# EAGLE board Project_2 (EAGLE 9.5.1)
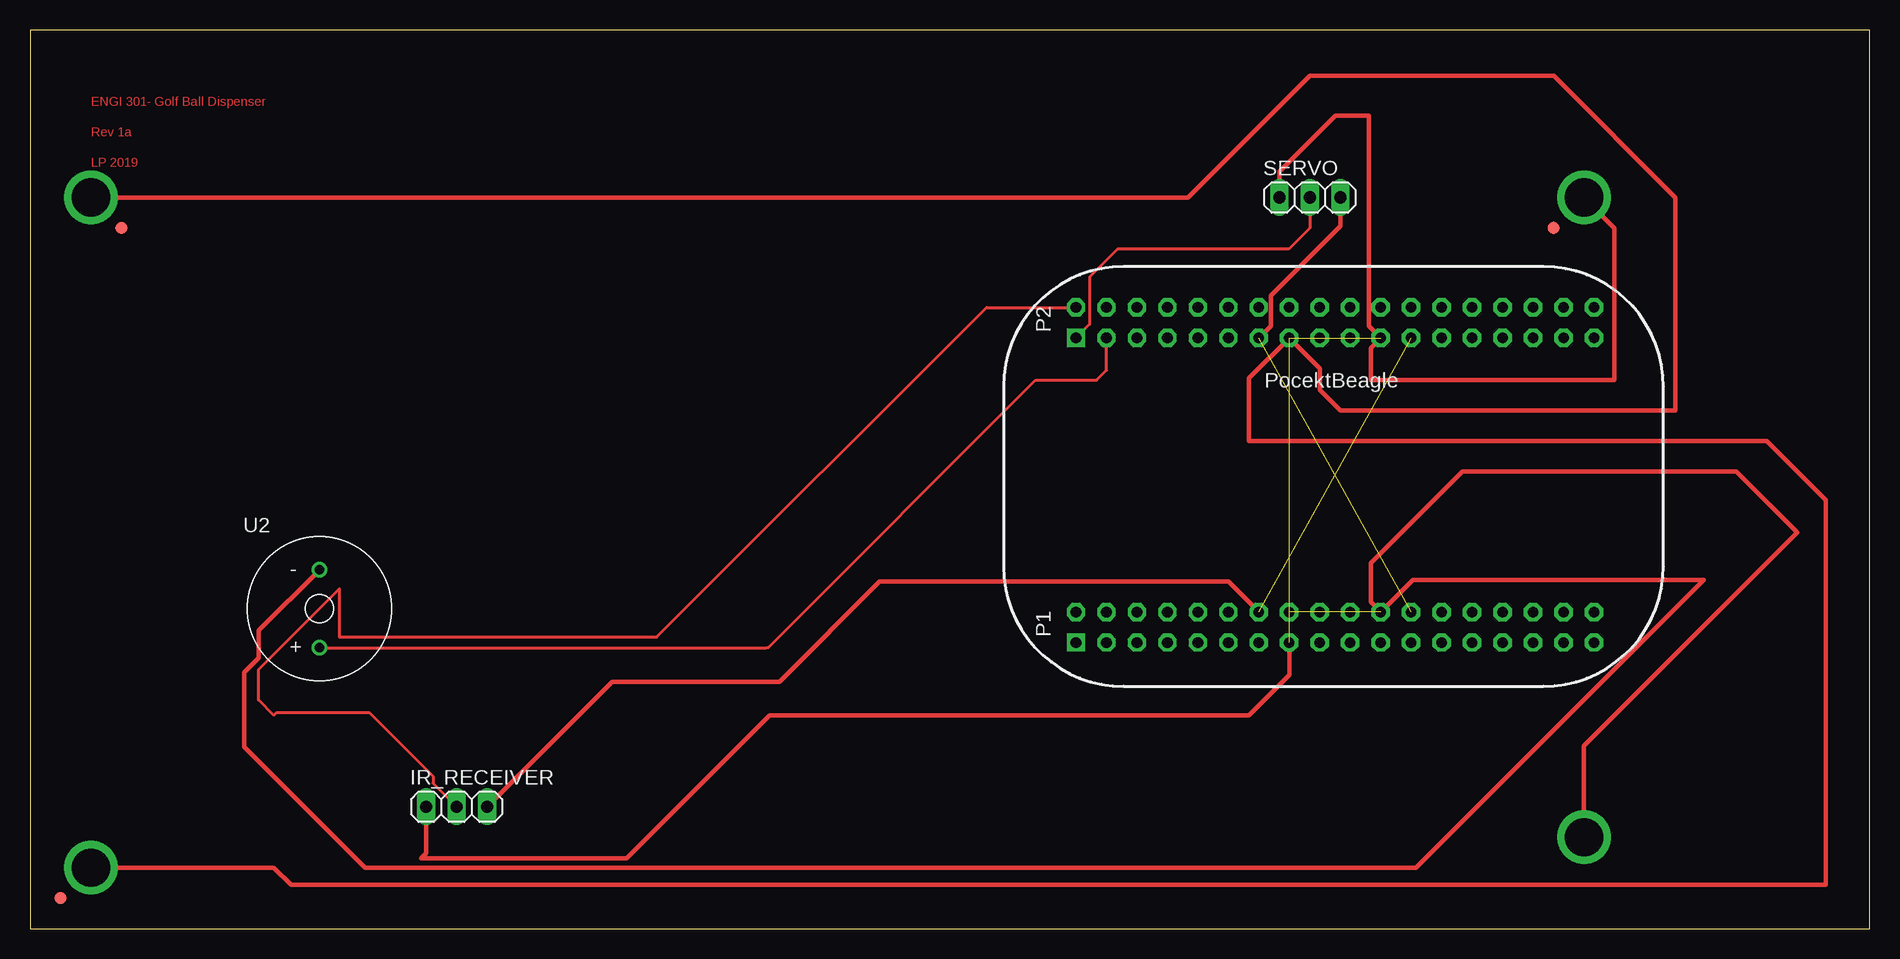
[diagram p0: board, top side]

Size 153.34 x 74.92 mm. Coordinates in mm from the lower left corner, seen from the top.
Outline: 0,0 153.34,0 153.34,74.92 0,74.92 0,0
Copper layers (1*16): Top 0.035mm / dielectric 1.5mm / Bottom 0.035mm
Design rules "default": minimum track width 6mil, minimum drill 0.35mm, track to track 6mil, track to pad 6mil, pad to pad 6mil, via to via 6mil, smd to smd 6mil, copper to edge 40mil, drill to drill 6mil, minimum pad ring 10mil, minimum via ring 8mil, stop-mask expansion 4mil, vias tented up to drill 0mil, thermal gap 10mil

## Footprints (pad centres in the part's own frame; a part is rotated, then mirrored left to right if it is on the bottom)
FIDUCIAL_40MIL = smd 1.016 x 1.016: P$1 0,0
1X03 = drill 1.016 long: 1 -2.54,0; 2 0,0; 3 2.54,0
MOUNTING_HOLE = drill 3.175 pad 4.445: P$1 0,0
BUZZER_6.5MM = drill 0.8: + 0,-3.25; - 0,3.25
POCKETBEAGLE = drill 0.889 pad 1.524 square: 1 5.91,3.53; 37 5.91,28.93 | drill 0.889 pad 1.524 octagon: 2 5.91,6.07; 3 8.45,3.53; 4 8.45,6.07; 5 10.99,3.53; 6 10.99,6.07; 7 13.53,3.53; 8 13.53,6.07; 9 16.07,3.53; 10 16.07,6.07; 11 18.61,3.53; 12 18.61,6.07; 13 21.15,3.53; 14 21.15,6.07; 15 23.69,3.53; 16 23.69,6.07; 17 26.23,3.53; 18 26.23,6.07; 19 28.77,3.53; 20 28.77,6.07; 21 31.31,3.53; 22 31.31,6.07; 23 33.85,3.53; 24 33.85,6.07; 25 36.39,3.53; 26 36.39,6.07; 27 38.93,3.53; 28 38.93,6.07; 29 41.47,3.53; 30 41.47,6.07; 31 44.01,3.53; 32 44.01,6.07; 33 46.55,3.53; 34 46.55,6.07; 35 49.09,3.53; 36 49.09,6.07; 38 5.91,31.47; 39 8.45,28.93; 40 8.45,31.47; 41 10.99,28.93; 42 10.99,31.47; 43 13.53,28.93; 44 13.53,31.47; 45 16.07,28.93; 46 16.07,31.47; 47 18.61,28.93; 48 18.61,31.47; 49 21.15,28.93; 50 21.15,31.47; 51 23.69,28.93; 52 23.69,31.47; 53 26.23,28.93; 54 26.23,31.47; 55 28.77,28.93; 56 28.77,31.47; 57 31.31,28.93; 58 31.31,31.47; 59 33.85,28.93; 60 33.85,31.47; 61 36.39,28.93; 62 36.39,31.47; 63 38.93,28.93; 64 38.93,31.47; 65 41.47,28.93; 66 41.47,31.47; 67 44.01,28.93; 68 44.01,31.47; 69 46.55,28.93; 70 46.55,31.47; 71 49.09,28.93; 72 49.09,31.47

## Placement (x,y rotation side)
FUD1  FIDUCIAL  [FIDUCIAL_40MIL]  2.54,2.54 0 top
FUD2  FIDUCIAL  [FIDUCIAL_40MIL]  7.62,58.42 0 top
FUD3  FIDUCIAL  [FIDUCIAL_40MIL]  127,58.42 0 top
IR_RECEIVER  [1X03]  35.56,10.16 0 top
MGT1  MOUNTING_HOLE  [MOUNTING_HOLE]  129.54,7.62 90 top
MGT2  MOUNTING_HOLE  [MOUNTING_HOLE]  129.54,60.96 0 top
MGT3  MOUNTING_HOLE  [MOUNTING_HOLE]  5.08,60.96 0 top
MGT4  MOUNTING_HOLE  [MOUNTING_HOLE]  5.08,5.08 0 top
SERVO  [1X03]  106.68,60.96 0 top
U2  BUZZER  [BUZZER_6.5MM]  24.13,26.67 0 top
U3  POCKETBEAGLE  [POCKETBEAGLE]  81.28,20.32 0 top

## Library data of the parts
FUD1-FUD3 MGT1-MGT4 U2 U3 = ENGI301
IR_RECEIVER SERVO = pinhead

## Nets
BAT.VIN: U3.50
BUZZER_PWM: U2.+ U3.39
GND: IR_RECEIVER.1 MGT1.P$1 MGT2.P$1 MGT3.P$1 MGT4.P$1 SERVO.1 U2.- U3.15 U3.16 U3.22 U3.51 U3.57
IR_RECEIVER: IR_RECEIVER.2 U3.38
SERVO: SERVO.2 U3.37
VDD_3P3V: IR_RECEIVER.3 U3.14 U3.59
VDD_5V: SERVO.3 U3.24 U3.49
VIN: U3.1

## Tracks (layer width: path | path; a pad name or v marks a point on that pad's centre or on a via)
BUZZER_PWM
  Top 0.152: 61.36,23.42 61.52,23.42
  Top 0.254: U2.+ 61.36,23.42 | U3.39 89.73,46.55 88.9,45.72 83.82,45.72 61.52,23.42
GND  (4 unrouted)
  Top 0.381: SERVO.1 104.14,63.12 108.81,67.79 111.6,67.79 111.6,50.24 U3.57 111.76,48.42 111.76,45.72 132.08,45.72 132.08,58.42 MGT2.P$1 | U2.- 19.05,24.84 19.05,22.56 17.86,21.37 17.86,15.16 27.94,5.08 115.54,5.08 139.54,29.08 115.28,29.08 U3.22 111.76,27.22 111.76,30.48 119.38,38.1 142.24,38.1 147.32,33.02 129.54,15.24 MGT1.P$1 | IR_RECEIVER.1 33.02,6.28 32.61,5.87 49.75,5.87 61.66,17.78 101.6,17.78 104.97,21.15 U3.15 | MGT3.P$1 96.52,60.96 106.68,71.12 127,71.12 137.16,60.96 137.16,43.18 109.22,43.18 107.51,44.89 107.51,46.71 U3.51 101.6,45.88 101.6,40.64 144.78,40.64 149.71,35.71 149.71,3.63 21.77,3.63 20.32,5.08 MGT4.P$1
IR_RECEIVER
  Top 0.254: U3.38 79.73,51.79 52.24,24.3 25.79,24.3 25.79,28.33 19.05,21.59 19.05,19.05 20.32,17.78 20.51,17.97 28.33,17.97 33.6,12.7 33.6,12.12 IR_RECEIVER.2
SERVO
  Top 0.254: SERVO.2 106.68,58.42 104.92,56.66 90.66,56.66 88.33,54.33 88.33,50.39 U3.37
VDD_3P3V  (1 unrouted)
  Top 0.381: IR_RECEIVER.3 48.52,20.57 62.48,20.57 70.83,28.93 99.89,28.93 U3.14
VDD_5V  (1 unrouted)
  Top 0.381: SERVO.3 109.22,58.58 103.42,52.78 103.42,50.24 U3.49

## Text on the board
Top: ENGI 301- Golf Ball Dispenser | Rev 1a | LP 2019